# Altium PCB ATMEGA8高仿PLC控制板.PCBDOC (part 1 of 3)
Units mm, origin at the board's own origin, x right, y up, seen from the top; angles counter-clockwise.
Board outline 152.4 x 101.6 mm, 2 copper layers (Top Layer, Bottom Layer); 72 components, 81 nets, 279 pads, 77 vias.
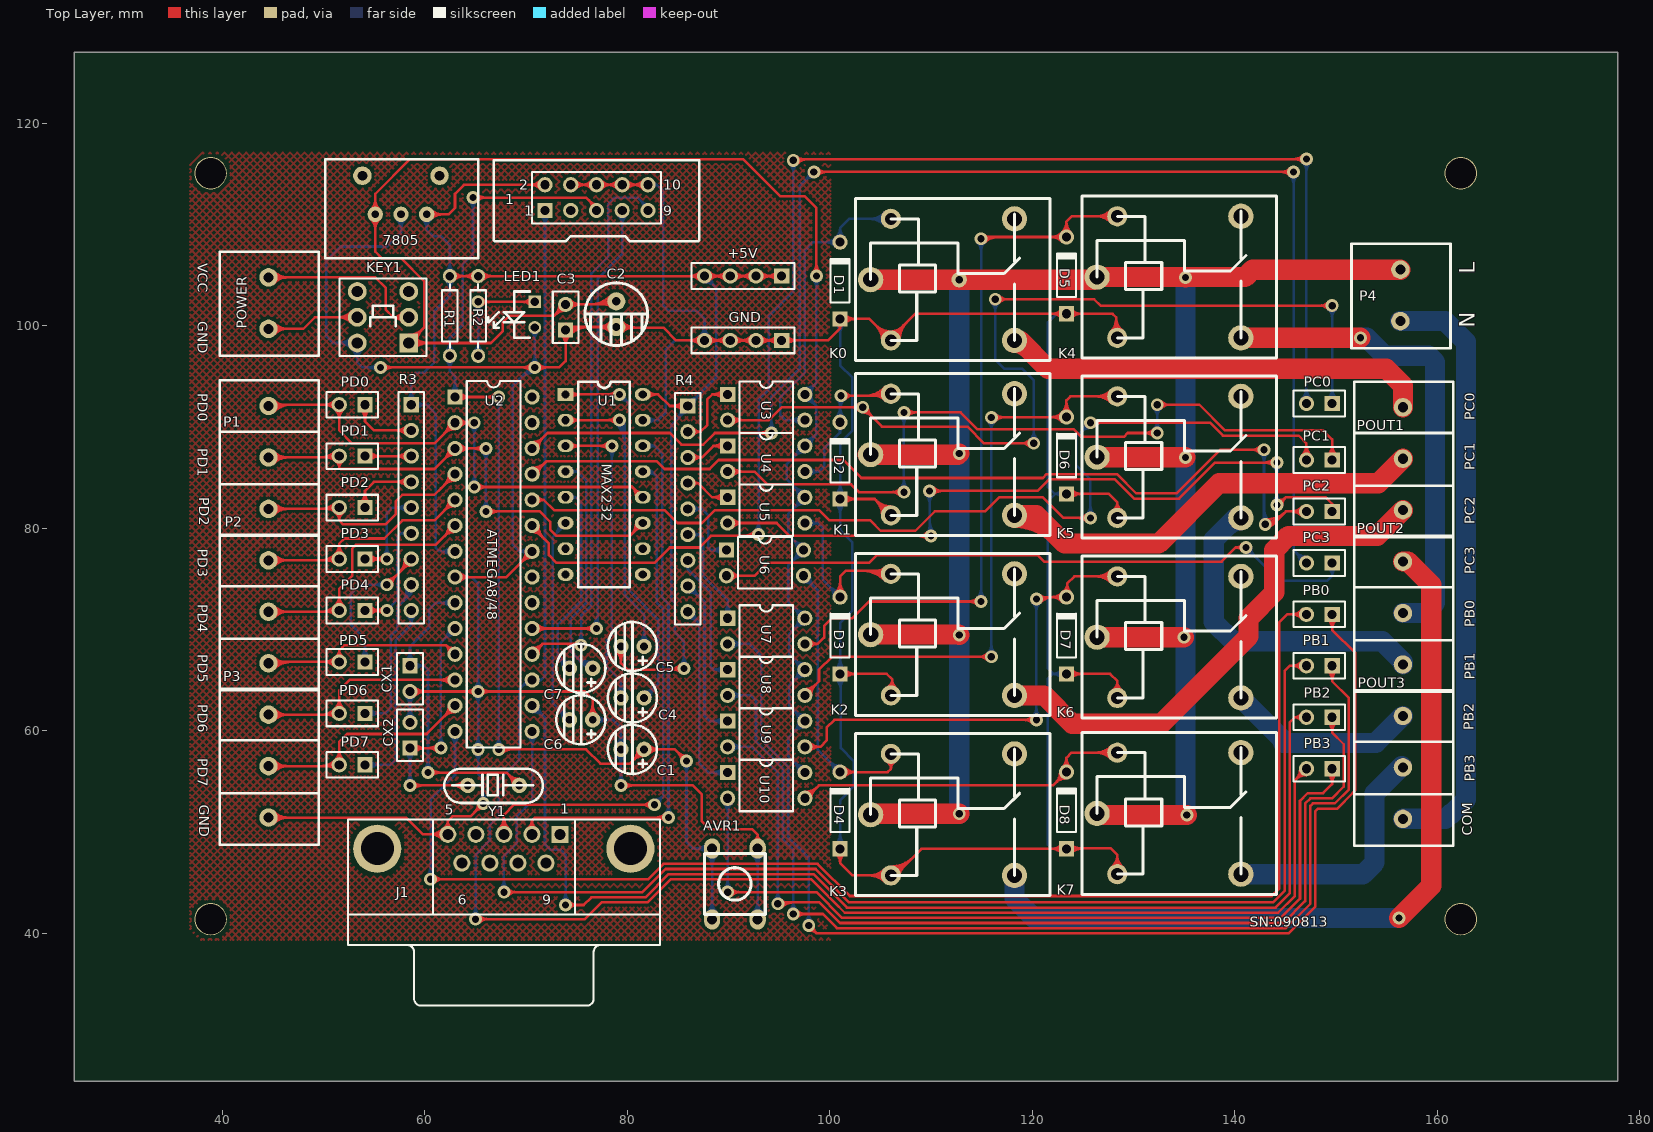
[diagram p0: Top Layer view]
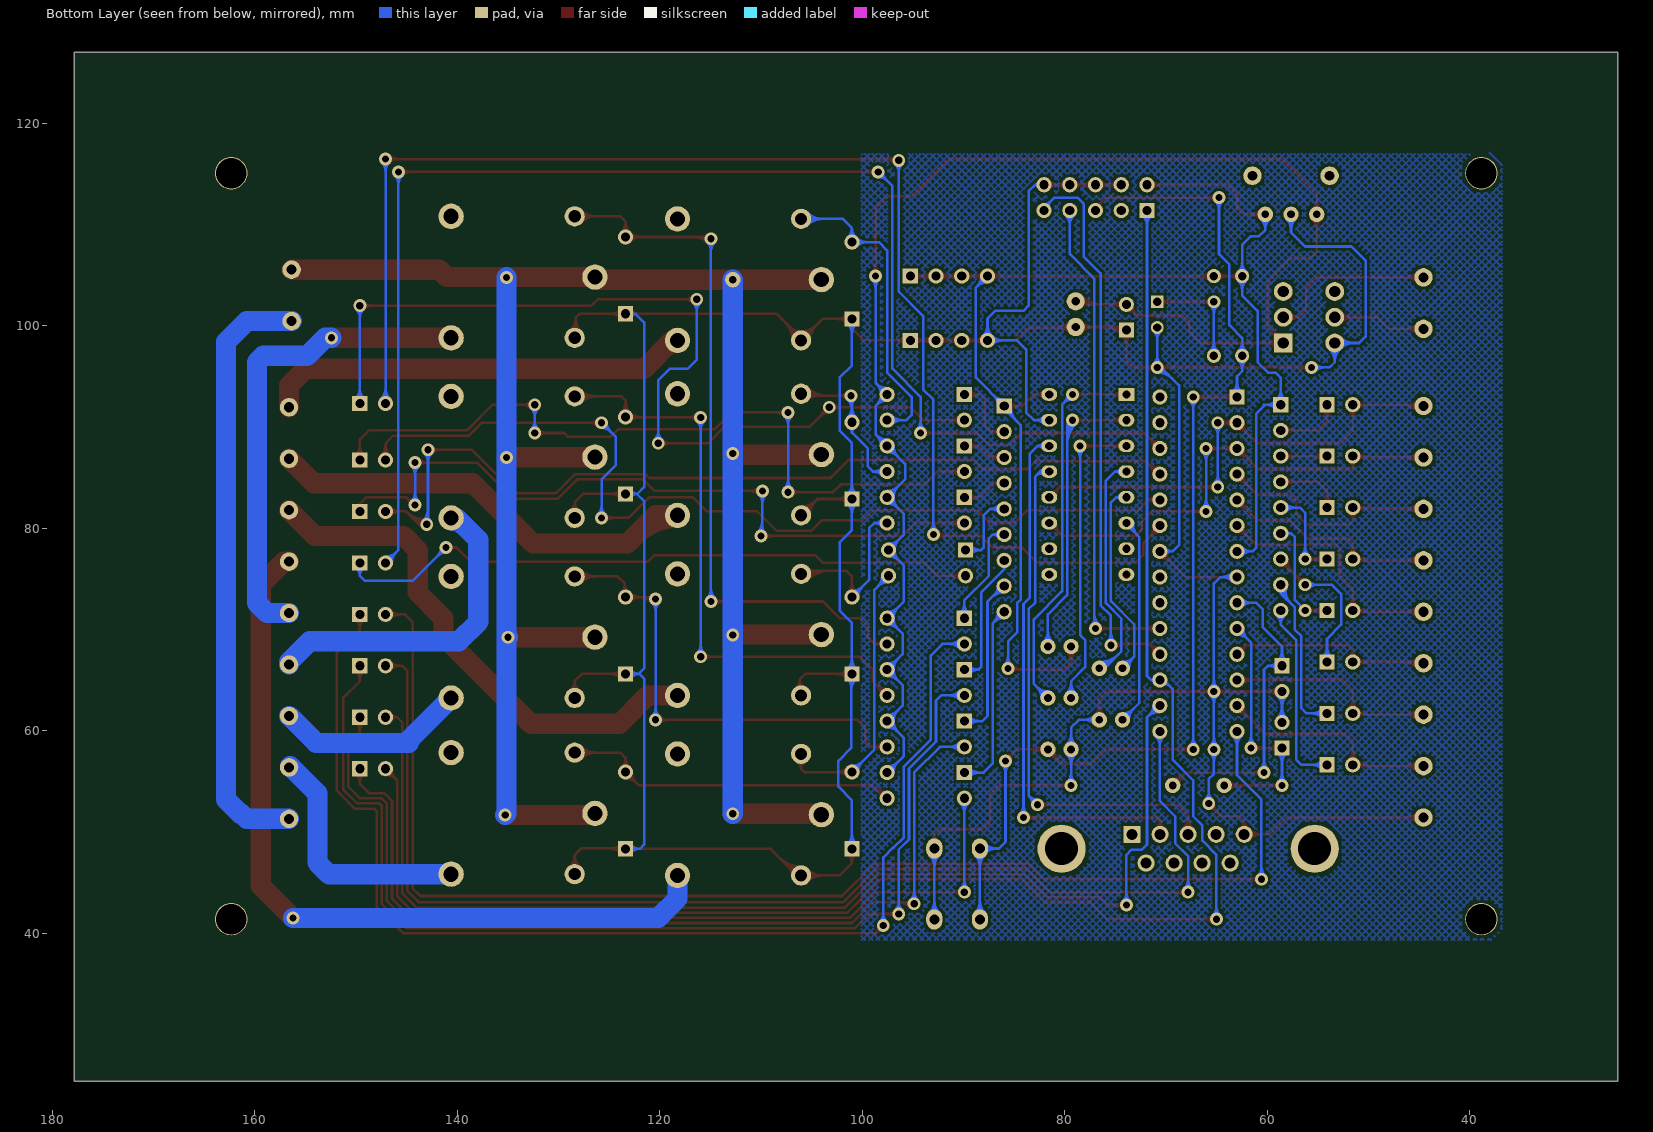
[diagram p1: Bottom Layer view, seen from below]

## Layer stack, top to bottom
Top Layer: signal copper 0.0356
Dielectric: dielectric 0.32, FR-4, Dk 4.8
Bottom Layer: signal copper 0.0356

## Board outline
25.4,25.4 177.8,25.4 177.8,127 25.4,127

## Design rules (kind name [scope] priority, off if disabled: settings)
Clearance [All] p1: gap=0.254
ComponentClearance [All] p1: gap=0.254 collisioncheckmode=3 verticalgap=0.254
PolygonConnect [All] p1: connectstyle=Relief reliefconductorwidth=0.254 reliefentries=4 polygonreliefangle="90 Angle"
RoutingVias [All] p1: holewidth=0.711 width=1.27 viastyle="Through Hole" minholewidth=0.711 minwidth=1.27 maxholewidth=0.711 maxwidth=1.27
SolderMaskExpansion [All] p1: expansion=0.102
TestPointUsage [All] p1: valid=0 allowmultiple=FALSE
Testpoint [All] p1: side=15 testpointundercomponent=TRUE minsize=1.016 maxsize=2.54 preferedsize=1.524 minholesize=0 maxholesize=1.016 preferedholesize=0.813 testpointgrid=0.025 style=1023 order=0-112345678
Width Width_10 [InNet('N')] p1: maxlimit=2 minlimit=2 preferedwidth=2
Width Width_9 [InNet('NetK7_1')] p2: maxlimit=2 minlimit=2 preferedwidth=2
Width Width_8 [InNet('NetK6_1')] p3: maxlimit=2 minlimit=2 preferedwidth=2
Width Width_7 [InNet('NetK5_1')] p4: maxlimit=2 minlimit=2 preferedwidth=2
Width Width_6 [InNet('NetK4_1')] p5: maxlimit=2 minlimit=2 preferedwidth=2
Width Width_5 [InNet('NetK3_1')] p6: maxlimit=2 minlimit=2 preferedwidth=2
Width Width_4 [InNet('NetK2_1')] p7: maxlimit=2 minlimit=2 preferedwidth=2
Width Width_3 [InNet('NetK1_1')] p8: maxlimit=2 minlimit=2 preferedwidth=2
Width Width_2 [InNet('NetK0_1')] p9: maxlimit=2 minlimit=2 preferedwidth=2
Width Width_1 [InNet('L')] p10: maxlimit=2 minlimit=2 preferedwidth=2
Width [All] p11: maxlimit=0.254 minlimit=0.254 preferedwidth=0.254
17 further rules are at their usual default settings.

## Components (designator, comment, footprint, x,y, rotation, side; value= is the part's Value field where it differs from the comment)
1 "Download" HDR-2x5 76.962,111.506 r0 top
7805 "SDWYG" wyk 57.658,110.998 r0 top
+5V "" HDR1X4 95.25,104.902 r180 top
AVR1 "" an-6*6 95.758,51.054 r90 top
C1 "10uf" C-DJ-4 79.248,60.706 r180 top
C2 "100uF\25v" C-DJ-6 78.994,99.822 r270 top
C3 "CPDR" CPDR 73.914,100.838 r90 top
C4 "10uf" C-DJ-4 79.248,65.786 r180 top
C5 "10uf" C-DJ-4 79.248,70.866 r180 top
C6 "10uf" C-DJ-4 74.168,63.627 r180 top
C7 "10uf" C-DJ-4 74.168,68.707 r180 top
CX1 "30p" HDR1X2 58.547,66.421 r270 top
CX2 "30p" HDR1X2 58.547,58.293 r90 top
D1 "ZL2JG" D-ZL-10 100.965,108.204 r90 top
D2 "ZL2JG" D-ZL-10 100.965,90.424 r90 top
D3 "ZL2JG" D-ZL-10 100.965,73.152 r90 top
D4 "ZL2JG" D-ZL-10 100.965,55.88 r90 top
D5 "ZL2JG" D-ZL-10 123.317,108.712 r90 top
D6 "ZL2JG" D-ZL-10 123.317,90.932 r90 top
D7 "ZL2JG" D-ZL-10 123.317,73.152 r90 top
D8 "ZL2JG" D-ZL-10 123.317,55.88 r90 top
GND "" HDR1X4 95.25,98.552 r180 top (schematic designator GND1)
J1 "D Connector 9" DSUB1.385-2H9 67.818,38.862 r180 top
K0 "JDQYCK" JQC-3F/T73 104.521,99.06 r0 top
K1 "JDQYCK" JQC-3F/T73 104.521,81.788 r0 top
K2 "JDQYCK" JQC-3F/T73 104.521,64.008 r0 top
K3 "JDQYCK" JQC-3F/T73 104.521,46.228 r0 top
K4 "JDQYCK" JQC-3F/T73 126.873,99.314 r0 top
K5 "JDQYCK" JQC-3F/T73 126.873,81.534 r0 top
K6 "JDQYCK" JQC-3F/T73 126.873,63.754 r0 top
K7 "JDQYCK" JQC-3F/T73 126.873,46.355 r0 top
KEY1 "SW-DPST" DPDT-6 55.88,100.838 r180 top
LED1 "LED" LED 70.358,100.33 r90 top
P1 "PZ_3" JK128_3 46.482,87.122 r0 top
P2 "PZ_3" JK128_3 46.482,71.882 r0 top
P3 "" JK128_3 46.482,56.642 r0 top
P4 "PZ_2" JK128_2 157.48,105.029 r0 top
PB0 "" CPDR 148.336,71.501 r180 top
PB1 "" CPDR 148.336,66.421 r180 top
PB2 "" CPDR 148.336,61.341 r180 top
PB3 "" CPDR 148.336,56.261 r180 top
PC0 "" CPDR 148.336,92.329 r180 top
PC1 "" CPDR 148.336,86.741 r180 top
PC2 "" CPDR 148.336,81.661 r180 top
PC3 "" CPDR 148.336,76.581 r180 top
PD0 "LED" HDR1X2 54.102,92.202 r180 top
PD1 "LED" HDR1X2 54.102,87.122 r180 top
PD2 "LED" HDR1X2 54.102,82.042 r180 top
PD3 "LED" HDR1X2 54.102,76.962 r180 top
PD4 "LED" HDR1X2 54.102,71.882 r180 top
PD5 "LED" HDR1X2 54.102,66.802 r180 top
PD6 "LED" HDR1X2 54.102,61.722 r180 top
PD7 "LED" HDR1X2 54.102,56.642 r180 top
POUT1 "PZ_3" JK128_3 158.496,86.995 r0 top
POUT2 "PZ_3" JK128_3 158.496,71.755 r0 top
POUT3 "PZ_3" JK128_3 158.496,56.515 r0 top
POWER "" JK128_2 45.72,104.267 r0 top
R1 "10k" RSE 62.484,100.965 r90 top
R2 "4.7k" RSE 65.278,100.965 r270 top
R3 "" HDR-9 58.674,76.962 r270 top
R4 "" HDR-9 85.979,76.835 r270 top (schematic designator R3)
U1 "MAX232" DIP16 73.914,93.218 r0 top
U2 "ATmega8" DIP-28 66.802,76.454 r270 top
U3 "GO" DIP-4 93.726,91.948 r270 top
U4 "GO" DIP-4 93.726,86.868 r270 top
U5 "GO" DIP-4 93.726,81.788 r270 top
U6 "GO" DIP-4 93.599,76.581 r270 top
U7 "GO" DIP-4 93.726,69.85 r270 top
U8 "GO" DIP-4 93.726,64.77 r270 top
U9 "GO" DIP-4 93.726,59.69 r270 top
U10 "GO" DIP-4 93.726,54.61 r270 top
Y1 "Y" JZ_ZC 69.342,54.61 r0 top

## Footprints (in the part's own frame and the unit in brackets; to place one, negate y for a bottom-side part, rotate by r counter-clockwise, add the part's x,y. Pads: shape width x height; smd on the part's side, far side on the other; paste and mask are expansions set on the pad)
an-6*6 [mm] "按键"
  oval 2x1.6 hole 1: 1(-9.675,7.381) 1(-2.675,7.381) 2(-9.675,2.881) 2(-2.675,2.881)
  silkscreen extent -9.17,2.13 -3.17,8.13
C-DJ-4 [mil] "电容4mm"
  round 60 hole 30: 1(-95,100) 2(-5,100)
  silkscreen extent -145,5 46,195
C-DJ-6 [mm] "电容6mm"
  round 1.8 hole 0.8: 1(-2.591,-0.076) 2(-0.051,-0.076)
  silkscreen extent -4.42,-3.18 1.78,3.02
CPDR [mm] "瓷片电容"
  rect 1.5x1.5 hole 0.9: 1(-1.27,0)
  round 1.5 hole 0.9: 2(1.27,0)
  silkscreen extent -2.54,-1.27 2.54,1.27
D-ZL-10 [mm] "整流二极管"
  rect 1.5x1.5 hole 0.9: 1(-7.532,-0.051)
  round 1.5 hole 0.9: 2(0.048,-0.051)
  silkscreen extent -5.89,-1 -1.5,0.9
DIP16 [mil] "直插16管脚"
  rect 62x49.21 hole 32: 1(-0.15,-0.04)
  oval 62x49.21 hole 32: 2(-0.15,-100.04) 3(-0.15,-200.04) 4(-0.15,-300.04) 5(-0.15,-400.04) 6(-0.15,-500.04) 7(-0.15,-600.04) 8(-0.15,-700.04) 9(299.85,-700.04) 10(299.85,-600.04) 11(299.85,-500.04) 12(299.85,-400.04) 13(299.85,-300.04) 14(299.85,-200.04) 15(299.85,-100.04) 16(299.85,-0.04)
  silkscreen extent 50,-750 250,50
DIP-4 [mm] "直插4管脚"
  rect 1.5x1.5 hole 0.9: 1(-1.27,-3.81)
  round 1.5 hole 0.9: 2(1.27,-3.81) 3(1.27,3.81) 4(-1.27,3.81)
  silkscreen extent -2.55,-2.65 2.55,2.65
DIP-28 [mm] "直插28管脚"
  rect 1.5x1.5 hole 0.9: 1(-16.51,-3.81)
  round 1.5 hole 0.9: 2(-13.97,-3.81) 3(-11.43,-3.81) 4(-8.89,-3.81) 5(-6.35,-3.81) 6(-3.81,-3.81) 7(-1.27,-3.81) 8(1.27,-3.81) 9(3.81,-3.81) 10(6.35,-3.81) 11(8.89,-3.81) 12(11.43,-3.81) 13(13.97,-3.81) 14(16.51,-3.81) 15(16.51,3.81) 16(13.97,3.81) 17(11.43,3.81) 18(8.89,3.81) 19(6.35,3.81) 20(3.81,3.81) 21(1.27,3.81) 22(-1.27,3.81) 23(-3.81,3.81) 24(-6.35,3.81) 25(-8.89,3.81) 26(-11.43,3.81) 27(-13.97,3.81) 28(-16.51,3.81)
  silkscreen extent -18.1,-2.65 18.1,2.65
DPDT-6 [mm] "开关按键"
  round 1.85 hole 1.1: 1(-2.54,0) 2(-2.54,-2.54) 4(2.54,-2.54) 5(2.54,0) 6(2.54,2.54)
  rect 1.85x1.85 hole 1.1: 3(-2.54,2.54)
  silkscreen extent -4.28,-3.81 4.28,3.81
DSUB1.385-2H9 [mm] "Connector; D Subminiature; 9 Position; Right Angle; Pitch 1.385 mm"
  rect 1.69x1.69 hole 1.09: 1(-5.54,-10.92)
  round 1.69 hole 1.09: 2(-2.77,-10.92) 3(0,-10.92) 4(2.77,-10.92) 5(5.54,-10.92) 6(-4.155,-8.08) 7(-1.385,-8.08) 8(1.385,-8.08) 9(4.155,-8.08)
  round 4.76 hole 3.26: 10(-12.495,-9.5) 11(12.495,-9.5)
  silkscreen extent -15.4,-12.4 15.4,6
HDR1X2 [mm] "Connector; Header; 2 Position"
  rect 1.5x1.5 hole 0.9: 1(0,0)
  round 1.5 hole 0.9: 2(2.54,0)
  silkscreen extent -1.27,-1.27 3.81,1.27
HDR1X4 [mm] "Connector; Header; 4 Position"
  rect 1.5x1.5 hole 0.9: 1(0,0)
  round 1.5 hole 0.9: 2(2.54,0) 3(5.08,0) 4(7.62,0)
  silkscreen extent -1.27,-1.27 8.89,1.27
HDR-2x5 [mm] "下载口"
  rect 1.5x1.5 hole 0.9: 1(-5.08,-0.127)
  round 1.5 hole 0.9: 2(-5.08,2.413) 3(-2.54,-0.127) 4(-2.54,2.413) 5(0,-0.127) 6(0,2.413) 7(2.54,-0.127) 8(2.54,2.413) 9(5.08,-0.127) 10(5.08,2.413)
  silkscreen extent -10.16,-3.17 10.16,4.83
HDR-9 [mm] "9排针"
  rect 1.5x1.5 hole 0.9: 1(-15.24,0)
  round 1.5 hole 0.9: 2(-12.7,0) 3(-10.16,0) 4(-7.62,0) 5(-5.08,0) 6(-2.54,0) 7(0,0) 8(2.54,0) 9(5.08,0)
  silkscreen extent -16.51,-1.27 6.35,1.27
JK128_2 [mil] "接线端子"
  round 71.81 hole 39.37: 1(-45,20) 2(-45,-180)
  silkscreen extent -235,-285 150,120
JK128_3 [mm] "接线端子_3"
  round 1.824 hole 1: 1(-1.905,4.953) 2(-1.905,-0.127) 3(-1.905,-5.207)
  silkscreen extent -6.73,-7.87 3.05,7.49
JQC-3F/T73 [mm] "继电器"
  round 2.5 hole 1.5: 1(13.716,-0.508) 2(13.716,11.492) 3(-0.484,5.492)
  round 2 hole 1.2: 4(1.516,11.492) 5(1.516,-0.508)
  silkscreen extent -1.98,-2.51 17.22,13.49
JZ_ZC [mil] "晶振"
  round 60 hole 30: 1(-200,0) 2(0,0)
  silkscreen extent -292,-68 92,65
LED [mil] "发光二极管"
  rect 50x50 hole 32: 1(80,-20)
  round 50 hole 32: 2(-20,-20)
  silkscreen extent -60,0 120,160
RSE [mm] "直插电阻1/8W"
  round 1.4 hole 0.85: 1(-3.937,0) 2(3.937,0)
  silkscreen extent -3.17,-0.76 3.17,0.76
wyk [mil] "三端稳压器"
  round 71.81 hole 37.87: 0(-150,150) 0(150,150)
  round 60 hole 30: 1(-100,0) 2(100,0) 3(0,0)
  silkscreen extent -295,-170 300,215

## Part data
1: library part "Header 5X2", "Header, 5-Pin, Dual row"
7805: "三端稳压器"
+5V GND: library part "Header 4", "Header, 4-Pin"
AVR1: library part SW-PB, "Switch"
C1 C2 C4 C5 C6 C7: library part "CAPACITOR POL", "Capacitor"
C3: "瓷片电容"
CX1 CX2: library part CAP, "Capacitor"
D1 D2 D3 D4 D5 D6 D7 D8: "整流二极管"
J1: "Receptacle Assembly, 9 Position, Right Angle"
K0 K1 K2 K3 K4 K5 K6 K7: "继电器——1常开1常闭"
KEY1: "Double-Pole, Single-Throw Switch"
P1 P2 POUT1 POUT2 POUT3: "排针——3"
P3: library part PZ_3, "排针——3"
P4: "排针——2"
PB0 PB1 PB2 PB3 PC0 PC1 PC2 PC3: library part LED, "发光二极管"
POWER: library part "Header 2", "Header, 2-Pin"
R1 R2: library part RES2
R3 R4: library part "Res PZ_8", "8位排阻"
U2: library part ATmega8-P, "8 位微处理器/28引脚"
U3 U4 U5 U6 U7 U8 U9 U10: "光耦"
Y1: library part CRYSTAL, "Crystal"

## Free pads (board coordinates)
  round 3.2 hole 3: 0(38.862,41.402) 0(38.862,115.062) 0(162.306,41.402) 0(162.306,115.062)
  round 1.524 hole 0.762: 1(112.776,104.552)

## Via types
v1: diameter 1.27, hole 0.711, Top Layer to Bottom Layer, 77 vias

## Nets (pads, with @x,y where several pads share a name; then routed paths per layer and width w, separated by ;. In a path a pad name is that pad's centre, name@x,y a point inside that pad or via, vN(x,y) a via of type N, cw(c..) or ccw(c..) an arc to the next point about the centre after c; other vN are vias at no path point)
AREF: U2.21
AVCC: U2.20
B0: R4.6 U7.1 | length 15.8
  Bottom Layer w0.254: R4.6@85.979,79.375 87.122,79.375 ; R4.6@86.503,79.037 cw(c87.122,78.638) 87.122,79.375 ; R4.6@86.503,79.713 ccw(c87.122,80.112) 87.122,79.375 ; U7.1@89.475,71.561 ccw(c88.412,72.624) 89.916,72.624 ccw(c91.42,72.624) U7.1@90.357,71.561 ; U7.1@89.655,71.381 ccw(c89.025,72.011) 89.916,72.011 ccw(c90.807,72.011) U7.1@90.177,71.381 ; U7.1@89.916,71.12 89.916,72.898 87.503,75.311 87.503,78.994 87.122,79.375
B1: R4.7 U8.1 | length 17.4
  Bottom Layer w0.254: R4.7@85.766,76.249 cw(c85.656,75.946) 85.979,75.946 ; R4.7@85.979,76.835 85.979,75.946 ; R4.7@86.192,76.249 ccw(c86.302,75.946) 85.979,75.946 ; U8.1@89.452,65.624 ccw(c88.519,64.785) 88.519,66.04 ; U8.1@89.452,66.456 cw(c88.519,67.295) 88.519,66.04 ; U8.1@89.641,65.793 ccw(c89.089,65.297) 89.089,66.04 ccw(c89.089,66.783) U8.1@89.641,66.287 ; U8.1@89.916,66.04 88.519,66.04 ; 85.979,75.946 88.265,73.66 88.265,66.294 88.519,66.04
B2: R4.8 U9.1 | length 23.1
  Bottom Layer w0.254: R4.8@85.979,73.672 cw(c85.979,71.861) 87.259,73.142 ; R4.8@85.979,73.926 cw(c85.979,72.729) 86.826,73.575 ; R4.8@85.979,74.295 86.106,74.295 87.63,72.771 87.63,61.468 88.138,60.96 U9.1@89.916,60.96 ; R4.8@86.602,74.295 ccw(c87.799,74.295) 86.953,73.448 ; U9.1@89.475,60.519 ccw(c88.412,59.456) 88.412,60.96 ccw(c88.412,62.464) U9.1@89.475,61.401 ; U9.1@89.655,60.699 ccw(c89.025,60.069) 89.025,60.96 ccw(c89.025,61.851) U9.1@89.655,61.221
B3: R4.9 U10.1 | length 26.1
  Bottom Layer w0.254: R4.9@85.979,71.132 cw(c85.979,69.628) 87.043,70.691 cw(c88.106,71.755) R4.9@86.602,71.755 ; R4.9@85.979,71.386 cw(c85.979,70.495) 86.609,71.125 cw(c87.239,71.755) R4.9@86.348,71.755 ; R4.9@85.979,71.755 87.122,70.612 87.122,56.769 88.011,55.88 U10.1@89.916,55.88 ; U10.1@89.475,55.439 ccw(c88.412,54.376) 88.412,55.88 ccw(c88.412,57.384) U10.1@89.475,56.321 ; U10.1@89.655,55.619 ccw(c89.025,54.989) 89.025,55.88 ccw(c89.025,56.771) U10.1@89.655,56.141
C0: R4.2 U3.1 | length 13.6
  Top Layer w0.254: R4.2@85.979,89.535 87.249,89.535 ; R4.2@86.271,89.309 cw(c86.731,88.953) 86.731,89.535 cw(c86.731,90.117) R4.2@86.271,89.761 ; R4.2@86.472,89.154 cw(c87.249,88.552) 87.249,89.535 ; R4.2@86.472,89.916 ccw(c87.249,90.518) 87.249,89.535 ; U3.1@89.475,92.777 ccw(c88.412,91.714) 88.412,93.218 ccw(c88.412,94.722) U3.1@89.475,93.659 ; U3.1@89.655,92.957 ccw(c89.025,92.327) 89.025,93.218 ccw(c89.025,94.109) U3.1@89.655,93.479 ; U3.1@89.916,93.218 88.392,93.218 87.884,92.71 87.884,90.17 87.249,89.535
C1: R4.3 U4.1 | length 11.1
  Top Layer w0.254: R4.3@85.979,86.995 87.376,86.995 ; R4.3@86.254,86.748 cw(c86.806,86.252) 86.806,86.995 cw(c86.806,87.738) R4.3@86.254,87.242 ; R4.3@86.443,86.579 cw(c87.376,85.74) 87.376,86.995 ; R4.3@86.443,87.411 ccw(c87.376,88.25) 87.376,86.995 ; U4.1@89.452,87.722 ccw(c88.519,86.883) 88.519,88.138 ; U4.1@89.452,88.554 cw(c88.519,89.393) 88.519,88.138 ; U4.1@89.641,87.891 ccw(c89.089,87.395) 89.089,88.138 ccw(c89.089,88.881) U4.1@89.641,88.385 ; U4.1@89.916,88.138 88.519,88.138 ; 87.376,86.995 88.519,88.138
C2: R4.4 U5.1 | length 9.4
  Top Layer w0.254: R4.4@85.979,84.455 86.995,84.455 ; R4.4@86.534,84.172 cw(c86.995,83.938) 86.995,84.455 ; R4.4@86.534,84.738 ccw(c86.995,84.972) 86.995,84.455 ; U5.1@89.475,82.617 ccw(c88.412,81.554) 88.412,83.058 ccw(c88.412,84.562) U5.1@89.475,83.499 ; U5.1@89.655,82.797 ccw(c89.025,82.167) 89.025,83.058 ccw(c89.025,83.949) U5.1@89.655,83.319 ; U5.1@89.916,83.058 88.392,83.058 86.995,84.455
C3: R4.5 U6.1 | length 14.5
  Bottom Layer w0.254: R4.5@85.979,81.915 87.376,81.915 ; R4.5@86.254,81.668 cw(c86.806,81.172) 86.806,81.915 cw(c86.806,82.658) R4.5@86.254,82.162 ; R4.5@86.443,81.499 cw(c87.376,80.66) 87.376,81.915 ; R4.5@86.443,82.331 ccw(c87.376,83.17) 87.376,81.915 ; U6.1@89.348,77.41 ccw(c88.285,76.347) 88.285,77.851 ccw(c88.285,79.355) U6.1@89.348,78.292 ; U6.1@89.528,77.59 ccw(c88.898,76.96) 88.898,77.851 ccw(c88.898,78.742) U6.1@89.528,78.112 ; U6.1@89.789,77.851 88.265,77.851 88.011,78.105 88.011,81.28 87.376,81.915
GND: 1.4 1.6 1.8 1.10 7805.3 AVR1.2 C1.2 C2.2 C3.1 C6.1 CX1.2 CX2.2 D1.1 D2.1 D3.1 D4.1 D5.1 D6.1 D7.1 D8.1 GND.1 GND.2 GND.3 GND.4 J1.5 K0.5 K1.5 K2.5 K3.5 K4.5 K5.5 K6.5 K7.5 KEY1.6 LED1.2 P3.3 U1.15 U2.8 U2.22 | length 798.5
  Top Layer w0.254: P3.3@44.577,51.435 58.166,51.435 59.819,49.782 J1.5@62.278,49.782 62.278,51.102 ; P3.3@44.952,51.06 cw(c45.859,50.153) 45.859,51.435 cw(c45.859,52.717) P3.3@44.952,51.81 ; P3.3@45.132,50.88 cw(c46.472,49.54) 46.472,51.435 cw(c46.472,53.33) P3.3@45.132,51.99 ; v1(55.626,95.885) 73.279,95.885 73.914,96.52 C3.1@73.914,100.203 ; v1@55.985,95.526 cw(c56.852,94.659) 56.852,95.885 cw(c56.852,97.111) v1@55.985,96.244 ; CX1.2@58.547,63.881 75.819,63.881 76.581,63.119 C6.1@76.581,61.087 ; CX1.2@58.808,63.62 cw(c59.438,62.99) 59.438,63.881 cw(c59.438,64.772) CX1.2@58.808,64.142 ; CX1.2@58.988,63.44 cw(c60.051,62.377) 60.051,63.881 cw(c60.051,65.385) CX1.2@58.988,64.322 ; J1.5@61.77,49.274 ccw(c60.545,48.049) 60.545,49.782 ccw(c60.545,51.515) J1.5@61.77,50.29 ; J1.5@61.888,50.385 ccw(c61.424,51.102) 62.278,51.102 ; J1.5@61.95,49.454 ccw(c61.158,48.662) 61.158,49.782 ccw(c61.158,50.902) J1.5@61.95,50.11 ; J1.5@62.026,50.172 ccw(c61.726,50.635) 62.278,50.635 ccw(c62.83,50.635) J1.5@62.53,50.172 ; J1.5@62.668,50.385 cw(c63.132,51.102) 62.278,51.102 ; U2.8@62.992,75.184 68.072,75.184 U2.22@70.612,77.724 ; U2.8@63.253,74.923 cw(c63.883,74.293) 63.883,75.184 cw(c63.883,76.075) U2.8@63.253,75.445 ; U2.8@63.433,74.743 cw(c64.496,73.68) 64.496,75.184 cw(c64.496,76.688) U2.8@63.433,75.625 ; v1@64.919,63.522 ccw(c64.052,62.655) 64.052,63.881 ccw(c64.052,65.107) v1@64.919,64.24 ; v1@65.278,52.832 cw(c64.052,52.832) 64.919,51.965 cw(c65.786,51.098) v1@65.786,52.324 ; v1@65.637,63.522 cw(c66.504,62.655) 66.504,63.881 cw(c66.504,65.107) v1@65.637,64.24 ; v1(65.786,52.832) 64.516,51.562 62.738,51.562 62.278,51.102 ; U2.22@69.989,77.724 cw(c68.485,77.724) 69.548,76.66 cw(c70.612,75.597) U2.22@70.612,77.101 ; U2.22@70.243,77.724 cw(c69.352,77.724) 69.982,77.094 cw(c70.612,76.464) U2.22@70.612,77.355 ; v1@70.507,95.526 ccw(c69.64,94.659) 69.64,95.885 ccw(c69.64,97.111) v1@70.507,96.244 ; v1@71.225,95.526 cw(c72.092,94.659) 72.092,95.885 cw(c72.092,97.111) v1@71.225,96.244 ; C3.1@73.473,99.127 cw(c72.41,98.064) 73.914,98.064 cw(c75.418,98.064) 74.355,99.127 cw(c76.154,97.328) 76.154,99.873 ; C3.1@73.653,99.307 cw(c73.023,98.677) 73.914,98.677 cw(c74.805,98.677) 74.175,99.307 cw(c75.541,97.941) 75.541,99.873 ; C3.1@73.914,99.568 74.219,99.873 C2.2@78.918,99.873 78.969,99.822 83.566,99.822 84.836,98.552 ; C3.1@73.995,99.487 cw(c74.927,98.555) 74.927,99.873 ; C3.1@74.355,100.009 ccw(c74.682,100.336) 74.682,99.873 ; 1.4@74.422,113.919 1.10@82.042,113.919 ; 1.4@74.683,113.658 cw(c75.313,113.028) 75.313,113.919 cw(c75.313,114.81) 1.4@74.683,114.18 ; 1.4@74.863,113.478 cw(c75.926,112.415) 75.926,113.919 cw(c75.926,115.423) 1.4@74.863,114.36 ; C6.1@76.132,61.536 ccw(c75.048,62.62) 76.581,62.62 ccw(c78.114,62.62) C6.1@77.03,61.536 ; C6.1@76.312,61.356 ccw(c75.661,62.007) 76.581,62.007 ccw(c77.501,62.007) C6.1@76.85,61.356 ; 1.6@76.521,113.478 ccw(c75.458,112.415) 75.458,113.919 ccw(c75.458,115.423) 1.6@76.521,114.36 ; 1.6@76.701,113.658 ccw(c76.071,113.028) 76.071,113.919 ccw(c76.071,114.81) 1.6@76.701,114.18 ; 1.6@77.223,113.658 cw(c77.853,113.028) 77.853,113.919 cw(c77.853,114.81) 1.6@77.223,114.18 ; 1.6@77.403,113.478 cw(c78.466,112.415) 78.466,113.919 cw(c78.466,115.423) 1.6@77.403,114.36 ; C2.2@78.371,99.326 ccw(c77.052,98.007) 77.052,99.873 ccw(c77.052,101.739) C2.2@78.371,100.419 ; C2.2@78.551,99.506 ccw(c77.665,98.62) 77.665,99.873 ccw(c77.665,101.126) C2.2@78.551,100.24 ; 1.8@79.061,113.478 ccw(c77.998,112.415) 77.998,113.919 ccw(c77.998,115.423) 1.8@79.061,114.36 ; 1.8@79.241,113.658 ccw(c78.611,113.028) 78.611,113.919 ccw(c78.611,114.81) 1.8@79.241,114.18 ; C2.2@79.285,99.506 cw(c80.048,98.742) 80.048,99.822 ; C2.2@79.285,100.24 ccw(c80.293,101.248) 80.293,99.822 ; v1(79.375,54.61) 86.487,54.61 87.376,53.721 87.376,51.054 88.138,50.292 92.329,50.292 92.877,49.744 ; C2.2@79.464,99.326 cw(c80.661,98.129) 80.661,99.822 ; C2.2@79.464,100.419 ccw(c80.907,101.862) 80.907,99.822 ; v1@79.734,54.251 cw(c80.601,53.384) 80.601,54.61 cw(c80.601,55.836) v1@79.734,54.969 ; 1.8@79.763,113.658 cw(c80.393,113.028) 80.393,113.919 cw(c80.393,114.81) 1.8@79.763,114.18 ; 1.8@79.943,113.478 cw(c81.006,112.415) 81.006,113.919 cw(c81.006,115.423) 1.8@79.943,114.36 ; 1.10@81.601,113.478 ccw(c80.538,112.415) 80.538,113.919 ccw(c80.538,115.423) 1.10@81.601,114.36 ; 1.10@81.781,113.658 ccw(c81.151,113.028) 81.151,113.919 ccw(c81.151,114.81) 1.10@81.781,114.18 ; GND.4@87.63,98.552 84.836,98.552 ; GND.3@90.17,98.552 84.836,98.552 ; GND.3@90.431,98.291 cw(c91.061,97.661) 91.061,98.552 cw(c91.061,99.443) GND.3@90.431,98.813 ; GND.3@90.611,98.111 cw(c91.674,97.048) 91.674,98.552 cw(c91.674,100.056) GND.3@90.611,98.993 ; GND.2@92.269,98.111 ccw(c91.206,97.048) 91.206,98.552 ccw(c91.206,100.056) GND.2@92.269,98.993 ; GND.2@92.449,98.291 ccw(c91.819,97.661) 91.819,98.552 ccw(c91.819,99.443) GND.2@92.449,98.813 ; AVR1.2@92.541,49.162 ccw(c92.206,49.744) 92.877,49.744 ; AVR1.2@92.877,48.379 92.877,49.744 ; GND.2@92.971,98.291 cw(c93.601,97.661) 93.601,98.552 cw(c93.601,99.443) GND.2@92.971,98.813 ; GND.2@93.151,98.111 cw(c94.214,97.048) 94.214,98.552 cw(c94.214,100.056) GND.2@93.151,98.993 ; AVR1.2@93.213,49.162 cw(c93.549,49.744) 92.877,49.744 ; GND.1@94.809,98.111 ccw(c93.746,97.048) 93.746,98.552 ccw(c93.746,100.056) GND.1@94.809,98.993 ; GND.1@94.989,98.291 ccw(c94.359,97.661) 94.359,98.552 ccw(c94.359,99.443) GND.1@94.989,98.813 ; GND.1@95.511,98.291 cw(c96.141,97.661) 96.141,98.552 cw(c96.141,99.443) GND.1@95.511,98.813 ; GND.1@95.691,98.111 cw(c96.754,97.048) 96.754,98.552 cw(c96.754,100.056) GND.1@95.691,98.993 ; D4.1@100.597,47.887 cw(c99.734,46.939) 101.016,46.939 ; D4.1@100.768,48.075 cw(c100.257,47.513) 101.016,47.513 cw(c101.776,47.513) D4.1@101.265,48.075 ; D1.1@100.782,100.095 cw(c100.64,99.746) 101.016,99.746 ; D4.1@101.016,48.348 101.016,46.939 ; D3.1@101.016,65.62 105.625,65.62 106.172,65.073 ; D2.1@101.016,82.892 104.425,82.892 K1.5@106.037,81.28 ; D1.1@101.251,100.095 ccw(c101.393,99.746) 101.016,99.746 ; D3.1@101.277,65.359 cw(c101.907,64.729) 101.907,65.62 cw(c101.907,66.511) D3.1@101.277,65.881 ; D2.1@101.277,82.631 cw(c101.907,82.001) 101.907,82.892 cw(c101.907,83.783) D2.1@101.277,83.153 ; D1.1@101.277,100.411 cw(c101.907,99.781) 101.907,100.672 cw(c101.907,101.563) D1.1@101.277,100.933 ; D4.1@101.436,47.887 ccw(c102.299,46.939) 101.016,46.939 ; D3.1@101.457,65.18 cw(c102.52,64.116) 102.52,65.62 cw(c102.52,67.124) D3.1@101.457,66.061 ; D2.1@101.457,82.452 cw(c102.52,81.388) 102.52,82.892 cw(c102.52,84.396) D2.1@101.457,83.333 ; D1.1@101.457,100.232 cw(c102.52,99.168) 102.52,100.672 cw(c102.52,102.176) D1.1@101.457,101.113 ; K1.5@105.164,81.28 ccw(c103.056,81.28) 104.547,82.77 ccw(c106.037,84.261) K1.5@106.037,82.153 ; K0.5@105.164,98.552 ccw(c103.056,98.552) 104.547,100.042 ccw(c106.037,101.533) 106.037,99.425 ccw(c106.037,100.939) 107.107,99.868 ; K1.5@105.418,81.28 ccw(c103.924,81.28) 104.98,82.337 ccw(c106.037,83.393) K1.5@106.037,81.899 ; K0.5@105.418,98.552 ccw(c103.924,98.552) 104.98,99.609 ccw(c106.037,100.665) 106.037,99.171 ccw(c106.037,100.071) 106.674,99.435 ; K3.5@105.42,45.103 ccw(c103.929,43.612) 103.929,45.72 ccw(c103.929,47.828) K3.5@105.42,46.337 ; K3.5@105.599,45.282 ccw(c104.543,44.226) 104.543,45.72 ccw(c104.543,47.214) K3.5@105.599,46.158 ; K2.5@105.672,64.293 ccw(c105.313,65.073) 106.172,65.073 ; K2.5@105.778,64.062 ccw(c105.496,64.677) 106.172,64.677 ; K3.5@106.037,46.085 ccw(c106.037,47.905) 107.324,46.618 ; K3.5@106.037,46.339 ccw(c106.037,48.772) 107.758,47.052 ; K3.5@106.037,46.593 ccw(c106.037,49.64) 108.191,47.485 ; K2.5@106.037,63.5 106.172,63.635 106.172,65.073 ; 106.172,64.532 ccw(c106.895,64.532) K2.5@106.433,63.976 ; K0.5@106.402,98.552 cw(c107.877,98.552) 106.834,99.595 ; K2.5@106.595,64.171 cw(c107.345,65.073) 106.172,65.073 ; K0.5@106.656,98.552 cw(c108.744,98.552) 107.268,100.029 ; K3.5@106.91,45.72 cw(c108.079,45.72) 107.252,46.546 ; K0.5@106.91,98.552 cw(c109.612,98.552) 107.701,100.462 ; D8.1@122.928,47.908 ccw(c121.864,46.844) 121.864,48.348 ccw(c121.864,49.852) D8.1@122.928,48.789 ; D5.1@122.928,100.74 ccw(c121.864,99.676) 121.864,101.18 ccw(c121.864,102.684) D5.1@122.928,101.621 ; D8.1@123.107,48.087 ccw(c122.477,47.457) 122.477,48.348 ccw(c122.477,49.239) D8.1@123.107,48.609 ; D5.1@123.107,100.919 ccw(c122.477,100.289) 122.477,101.18 ccw(c122.477,102.071) D5.1@123.107,101.441 ; D7.1@123.368,65.62 127.674,65.62 128.389,64.905 ; D6.1@123.368,83.4 127.547,83.4 128.389,82.558 ; D8.1@123.629,48.087 cw(c124.353,47.364) 124.353,48.387 ; D8.1@123.629,48.609 ccw(c124.165,49.145) 124.165,48.387 ; D7.1@123.629,65.359 cw(c124.259,64.729) 124.259,65.62 cw(c124.259,66.511) D7.1@123.629,65.881 ; D6.1@123.629,83.139 cw(c124.259,82.509) 124.259,83.4 cw(c124.259,84.291) D6.1@123.629,83.661 ; D5.1@123.629,100.919 cw(c124.259,100.289) 124.259,101.18 cw(c124.259,102.071) D5.1@123.629,101.441 ; D8.1@123.809,47.908 cw(c124.966,46.75) 124.966,48.387 ; D8.1@123.809,48.789 ccw(c124.779,49.759) 124.779,48.387 ; D7.1@123.809,65.18 cw(c124.872,64.116) 124.872,65.62 cw(c124.872,67.124) D7.1@123.809,66.061 ; D6.1@123.809,82.96 cw(c124.872,81.896) 124.872,83.4 cw(c124.872,84.904) D6.1@123.809,83.841 ; D5.1@123.809,100.74 cw(c124.872,99.676) 124.872,101.18 cw(c124.872,102.684) D5.1@123.809,101.621 ; K4.5@127.772,99.423 ccw(c126.569,100.626) 128.27,100.626 ; K7.5@127.817,46.506 ccw(c126.73,47.76) 128.389,47.76 ; K6.5@127.895,63.966 ccw(c127.249,64.905) 128.389,64.905 ; K5.5@127.944,81.777 ccw(c127.481,82.558) 128.389,82.558 ; K4.5@127.951,99.244 ccw(c127.182,100.013) 128.27,100.013 ; K7.5@127.983,46.315 ccw(c127.213,47.203) 128.389,47.203 ccw(c129.565,47.203) K7.5@128.795,46.315 ; K6.5@128.039,63.756 ccw(c127.581,64.422) 128.389,64.422 ccw(c129.197,64.422) K6.5@128.74,63.756 ; K5.5@128.074,81.559 ccw(c127.746,82.112) 128.389,82.112 ccw(c129.033,82.112) K5.5@128.705,81.559 ; 128.27,100.318 ccw(c129.568,100.318) K4.5@128.77,99.294 ; K7.5@128.389,45.847 128.389,47.76 ; K6.5@128.389,63.246 128.389,64.905 ; K5.5@128.389,81.026 128.389,82.558 ; K4.5@128.389,98.806 128.27,98.925 128.27,100.838 ; K5.5@128.834,81.777 cw(c129.297,82.558) 128.389,82.558 ; K6.5@128.883,63.966 cw(c129.529,64.905) 128.389,64.905 ; K4.5@128.926,99.494 cw(c129.974,100.838) 128.27,100.838 ; K7.5@128.961,46.506 cw(c130.048,47.76) 128.389,47.76 ; 84.836,98.552 GND.2@92.71,98.552 99.822,98.552 101.016,99.746 ; 86.126,98.552 cw(c86.126,97.048) GND.4@87.189,98.111 ; 86.126,98.552 ccw(c86.126,100.056) GND.4@87.189,98.993 ; 86.126,98.552 cw(c86.126,97.048) GND.4@87.189,98.111 ; 86.126,98.552 ccw(c86.126,100.056) GND.4@87.189,98.993 ; 86.126,98.552 cw(c86.126,97.048) GND.4@87.189,98.111 ; 86.126,98.552 ccw(c86.126,100.056) GND.4@87.189,98.993 ; 86.739,98.552 cw(c86.739,97.661) GND.4@87.369,98.291 ; 86.739,98.552 ccw(c86.739,99.443) GND.4@87.369,98.813 ; 86.739,98.552 cw(c86.739,97.661) GND.4@87.369,98.291 ; 86.739,98.552 ccw(c86.739,99.443) GND.4@87.369,98.813 ; 86.739,98.552 cw(c86.739,97.661) GND.4@87.369,98.291 ; 86.739,98.552 ccw(c86.739,99.443) GND.4@87.369,98.813 ; 88.521,98.552 cw(c88.521,99.443) 87.891,98.813 ccw(c88.521,99.443) 88.521,98.552 ; 88.521,98.552 ccw(c88.521,97.661) 87.891,98.291 cw(c88.521,97.661) 88.521,98.552 ; 88.666,98.552 cw(c88.666,97.048) 89.729,98.111 ccw(c88.666,97.048) 88.666,98.552 ; 88.666,98.552 ccw(c88.666,100.056) 89.729,98.993 cw(c88.666,100.056) 88.666,98.552 ; 89.134,98.552 cw(c89.134,100.056) 88.071,98.993 ccw(c89.134,100.056) 89.134,98.552 ; 89.134,98.552 ccw(c89.134,97.048) 88.071,98.111 cw(c89.134,97.048) 89.134,98.552 ; 89.279,98.552 cw(c89.279,97.661) 89.909,98.291 ccw(c89.279,97.661) 89.279,98.552 ; 89.279,98.552 ccw(c89.279,99.443) 89.909,98.813 cw(c89.279,99.443) 89.279,98.552 ; 101.016,46.939 102.235,45.72 106.426,45.72 109.054,48.348 D8.1@123.368,48.348 123.407,48.387 127.762,48.387 128.389,47.76 ; 101.016,99.746 D1.1@101.016,100.672 103.917,100.672 K0.5@106.037,98.552 106.037,98.798 108.419,101.18 127.928,101.18 128.27,100.838
  Bottom Layer w0.254: KEY1.6@52.776,97.734 ccw(c51.413,96.371) 51.413,98.298 ccw(c51.413,100.225) KEY1.6@52.776,98.862 ; KEY1.6@52.78,97.729 cw(c51.465,96.393) 53.34,96.393 ; KEY1.6@52.955,97.913 ccw(c52.027,96.985) 52.027,98.298 ccw(c52.027,99.611) KEY1.6@52.955,98.683 ; KEY1.6@52.958,97.91 cw(c52.062,96.999) 53.34,96.999 cw(c54.618,96.999) KEY1.6@53.722,97.91 ; KEY1.6@53.9,97.729 ccw(c55.215,96.393) 53.34,96.393 ; v1@55.267,95.526 ccw(c54.4,94.659) 54.4,95.885 ccw(c54.4,97.111) v1@55.267,96.244 ; v1(55.626,95.885) 53.848,95.885 53.34,96.393 ; 7805.3@57.209,110.549 cw(c56.125,109.465) 57.658,109.465 cw(c59.191,109.465) 7805.3@58.107,110.549 ; 7805.3@57.389,110.729 cw(c56.738,110.078) 57.658,110.078 cw(c58.578,110.078) 7805.3@57.927,110.729 ; 7805.3@57.658,110.998 57.658,109.22 56.261,107.823 51.689,107.823 50.292,106.426 50.292,98.933 50.927,98.298 KEY1.6@53.34,98.298 53.34,96.393 ; CX2.2@58.106,61.274 ccw(c57.043,62.337) 58.547,62.337 ccw(c60.051,62.337) CX2.2@58.988,61.274 ; CX1.2@58.106,63.44 cw(c57.043,62.377) 58.547,62.377 cw(c60.051,62.377) CX1.2@58.988,63.44 ; CX2.2@58.286,61.094 ccw(c57.656,61.724) 58.547,61.724 ccw(c59.438,61.724) CX2.2@58.808,61.094 ; CX1.2@58.286,63.62 cw(c57.656,62.99) 58.547,62.99 cw(c59.438,62.99) CX1.2@58.808,63.62 ; CX2.2@58.547,60.833 CX1.2@58.547,63.881 ; U2.8@62.992,75.184 64.643,75.184 65.278,74.549 65.278,55.753 65.786,55.245 v1(65.786,52.832) ; U2.8@63.253,74.923 cw(c63.883,74.293) 63.883,75.184 cw(c63.883,76.075) U2.8@63.253,75.445 ; U2.8@63.433,74.743 cw(c64.496,73.68) 64.496,75.184 cw(c64.496,76.688) U2.8@63.433,75.625 ; v1@64.919,57.807 cw(c64.052,56.94) 65.278,56.94 cw(c66.504,56.94) v1@65.637,57.807 ; v1@64.919,58.525 ccw(c64.052,59.392) 65.278,59.392 ccw(c66.504,59.392) v1@65.637,58.525 ; v1@64.919,63.522 cw(c64.052,62.655) 65.278,62.655 cw(c66.504,62.655) v1@65.637,63.522 ; v1@64.919,64.24 ccw(c64.052,65.107) 65.278,65.107 ccw(c66.504,65.107) v1@65.637,64.24 ; v1@65.427,53.191 ccw(c64.56,54.058) 65.786,54.058 ccw(c67.012,54.058) v1@66.145,53.191 ; 69.348,94.748 cw(c70.866,93.231) v1@70.866,95.377 ; 69.782,95.182 cw(c70.866,94.098) v1@70.866,95.631 ; U2.22@70.119,77.343 ccw(c69.342,76.741) 69.342,77.724 ; U2.22@70.119,78.105 cw(c69.342,78.707) 69.342,77.724 ; 70.216,95.616 cw(c70.866,94.965) v1(70.866,95.885) ; 70.268,95.668 ccw(c70.051,95.885) v1@70.358,95.885 ; U2.22@70.32,77.498 ccw(c69.86,77.142) 69.86,77.724 ccw(c69.86,78.306) U2.22@70.32,77.95 ; v1@70.507,96.244 ccw(c69.64,97.111) 70.866,97.111 ccw(c72.092,97.111) v1@71.225,96.244 ; LED1.2@70.507,99.463 cw(c69.64,98.596) 70.866,98.596 cw(c72.092,98.596) LED1.2@71.225,99.463 ; U2.22@70.612,77.724 69.342,77.724 ; LED1.2@70.866,99.822 v1(70.866,95.885) ; C6.1@76.581,61.087 78.613,61.087 79.375,60.325 79.375,54.864 v1(79.375,54.61) ; C6.1@76.85,60.818 cw(c77.501,60.167) 77.501,61.087 cw(c77.501,62.007) C6.1@76.85,61.356 ; C6.1@77.03,60.638 cw(c78.114,59.554) 78.114,61.087 cw(c78.114,62.62) C6.1@77.03,61.536 ; C1.2@78.926,57.717 cw(c77.842,56.633) 79.375,56.633 cw(c80.908,56.633) C1.2@79.824,57.717 ; C1.2@78.926,58.615 ccw(c77.842,59.699) 79.375,59.699 ccw(c80.908,59.699) C1.2@79.824,58.615 ; v1@79.016,54.969 ccw(c78.149,55.836) 79.375,55.836 ccw(c80.601,55.836) v1@79.734,54.969 ; C1.2@79.106,57.897 cw(c78.455,57.246) 79.375,57.246 cw(c80.295,57.246) C1.2@79.644,57.897 ; C1.2@79.106,58.435 ccw(c78.455,59.086) 79.375,59.086 ccw(c80.295,59.086) C1.2@79.644,58.435 ; U1.15@81.53,90.677 83.057,90.677 83.82,91.44 83.82,97.663 84.709,98.552 GND.4@87.63,98.552 87.63,100.711 86.868,101.473 84.074,101.473 83.566,101.981 83.566,113.284 82.931,113.919 ; 1.10@82.042,113.919 82.931,113.919 ; U1.15@82.045,90.325 cw(c82.895,89.475) 82.895,90.677 cw(c82.895,91.879) U1.15@82.045,91.029 ; 1.10@82.628,113.706 cw(c82.931,113.596) 82.931,113.919 ; 1.10@82.628,114.132 ccw(c82.931,114.242) 82.931,113.919 ; GND.4@87.189,98.111 ccw(c86.126,97.048) 86.126,98.552 ccw(c86.126,100.056) 87.189,98.993 ccw(c86.126,100.056) 87.63,100.056 ccw(c89.134,100.056) GND.4@88.071,98.993 ; GND.4@87.369,98.291 ccw(c86.739,97.661) 86.739,98.552 ccw(c86.739,99.443) 87.369,98.813 ccw(c86.739,99.443) 87.63,99.443 ccw(c88.521,99.443) GND.4@87.891,98.813 ; AVR1.2@92.401,42.055 ccw(c91.252,43.204) 92.877,43.204 ccw(c94.502,43.204) AVR1.2@93.353,42.055 ; AVR1.2@92.401,47.703 cw(c91.252,46.554) 92.877,46.554 cw(c94.502,46.554) AVR1.2@93.353,47.703 ; AVR1.2@92.581,41.875 ccw(c91.866,42.591) 92.877,42.591 ccw(c93.889,42.591) AVR1.2@93.173,41.875 ; AVR1.2@92.581,47.883 cw(c91.866,47.167) 92.877,47.167 cw(c93.889,47.167) AVR1.2@93.173,47.883 ; AVR1.2@92.877,41.379 AVR1.2@92.877,48.379 ; D4.1@100.576,48.789 ccw(c99.512,49.852) 101.016,49.852 ccw(c102.52,49.852) D4.1@101.457,48.789 ; D3.1@100.576,65.18 cw(c99.33,63.933) 101.092,63.933 ; D3.1@100.576,66.061 ccw(c99.512,67.124) 101.016,67.124 ccw(c102.52,67.124) D3.1@101.457,66.061 ; D2.1@100.576,82.452 cw(c99.512,81.388) 101.016,81.388 cw(c102.52,81.388) D2.1@101.457,82.452 ; D2.1@100.576,83.333 ccw(c99.512,84.396) 101.016,84.396 ccw(c102.52,84.396) D2.1@101.457,83.333 ; D1.1@100.576,100.232 cw(c99.512,99.168) 101.016,99.168 cw(c102.52,99.168) D1.1@101.457,100.232 ; D4.1@100.755,48.609 ccw(c100.125,49.239) 101.016,49.239 ccw(c101.907,49.239) D4.1@101.277,48.609 ; D3.1@100.755,65.359 cw(c99.943,64.547) 101.092,64.547 ; D3.1@100.755,65.881 ccw(c100.125,66.511) 101.016,66.511 ccw(c101.907,66.511) D3.1@101.277,65.881 ; D2.1@100.755,82.631 cw(c100.125,82.001) 101.016,82.001 cw(c101.907,82.001) D2.1@101.277,82.631 ; D2.1@100.755,83.153 ccw(c100.125,83.783) 101.016,83.783 ccw(c101.907,83.783) D2.1@101.277,83.153 ; D1.1@100.755,100.411 cw(c100.125,99.781) 101.016,99.781 cw(c101.907,99.781) D1.1@101.277,100.411 ; D1.1@100.799,100.672 D1.1@101.016,100.672 101.016,96.088 102.235,94.869 102.235,89.662 101.016,88.443 101.016,79.832 102.235,78.613 102.235,71.882 101.016,70.663 D3.1@101.016,65.62 101.092,65.544 101.092,58.293 102.362,57.023 102.362,54.483 101.016,53.137 D4.1@101.016,48.348 ; 101.092,64.299 cw(c102.338,64.299) D3.1@101.457,65.18 ; 122.086,65.62 121.539,66.167 121.539,82.677 122.262,83.4 ; D5.1@122.804,100.916 ccw(c122.389,100.722) 122.389,101.18 ; D5.1@122.804,101.444 cw(c122.389,101.638) 122.389,101.18 ; D6.1@122.848,83.058 ccw(c122.213,82.64) 122.213,83.4 ; D6.1@122.848,83.743 cw(c122.213,84.16) 122.213,83.4 ; D7.1@122.897,65.213 ccw(c122.008,64.447) 122.008,65.62 ; D7.1@122.897,66.027 cw(c122.008,66.793) 122.008,65.62 ; D8.1@122.908,47.929 ccw(c121.959,47.065) 121.959,48.348 ; D8.1@122.908,48.768 cw(c121.959,49.631) 121.959,48.348 ; D7.1@123.089,65.379 ccw(c122.563,64.925) 122.563,65.62 ccw(c122.563,66.315) D7.1@123.089,65.861 ; D8.1@123.095,48.1 ccw(c122.534,47.588) 122.534,48.348 ccw(c122.534,49.108) D8.1@123.095,48.597 ; D8.1@123.368,48.348 121.959,48.348 ; D7.1@123.368,65.62 122.008,65.62 ; D6.1@123.368,83.4 122.213,83.4 ; D5.1@123.368,101.18 122.389,101.18 ; 69.342,77.724 68.707,78.359 68.707,94.107 70.485,95.885 v1(70.866,95.885) ; 121.959,48.348 121.539,48.768 121.539,65.151 122.008,65.62 ; 122.213,83.4 121.539,84.074 121.539,100.33 122.389,101.18
  other v1: 65.278,58.166 65.278,63.881
L: K0.3 K1.3 K2.3 K3.3 K4.3 K5.3 K6.3 K7.3 P4.1 pad.1 | length 211.5
  Top Layer w2: K1.3@103.759,87.249 112.649,87.249 v1(112.776,87.376) ; K3.3@104.037,51.72 104.133,51.816 v1(112.776,51.816) ; K2.3@104.037,69.5 112.745,69.5 v1(112.776,69.469) ; K0.3@104.037,104.552 126.135,104.552 K4.3@126.389,104.806 141.001,104.806 141.732,105.537 P4.1@156.337,105.537 ; K7.3@126.389,51.847 126.547,51.689 v1(135.255,51.689) ; K6.3@126.389,69.246 v1(134.97,69.246) ; K5.3@126.389,87.026 135.097,87.026 v1(135.128,86.995) ; v1(135.128,104.775) v1@135.128,104.806
  Bottom Layer w2: v1(112.776,51.816) pad.1@112.776,104.552 ; v1(134.97,69.246) v1@135.001,69.215 ; v1(135.128,104.775) 135.128,51.816 v1(135.255,51.689)
N: P4.2 POUT3.3 | length 59.5
  Bottom Layer w2: P4.2@156.337,100.457 160.782,100.457 162.814,98.425 162.814,53.213 161.417,51.816 161.29,51.816 160.782,51.308 POUT3.3@156.591,51.308